# EAGLE board Teensy3p2Cutout (EAGLE 9.6.2)
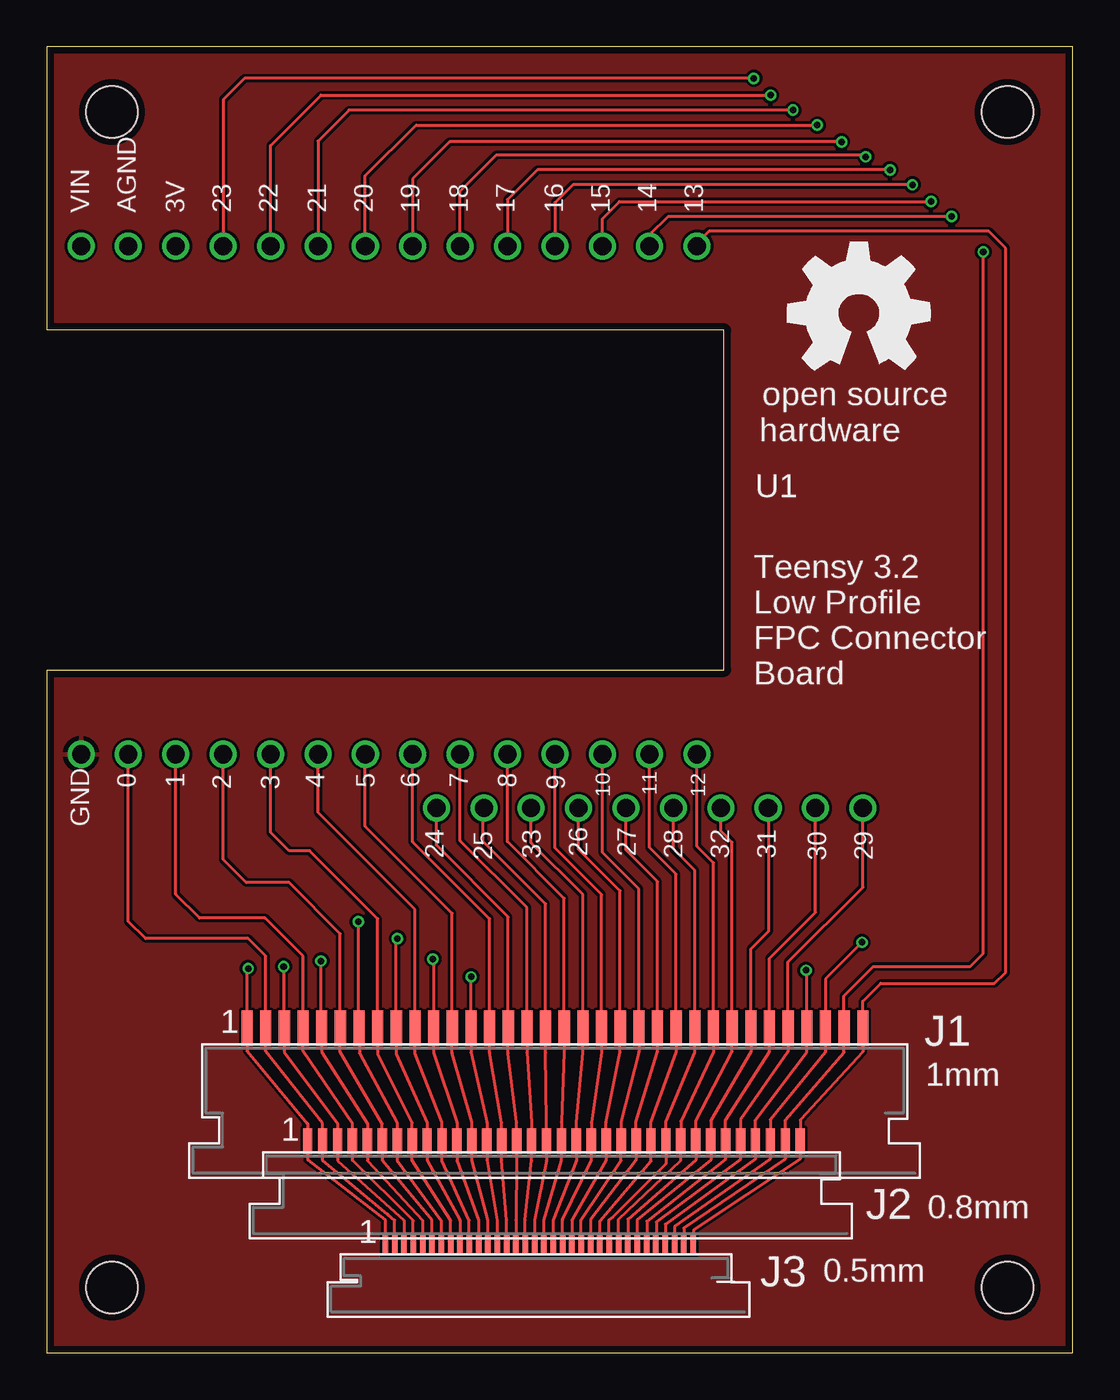
[diagram p0: board, top side]
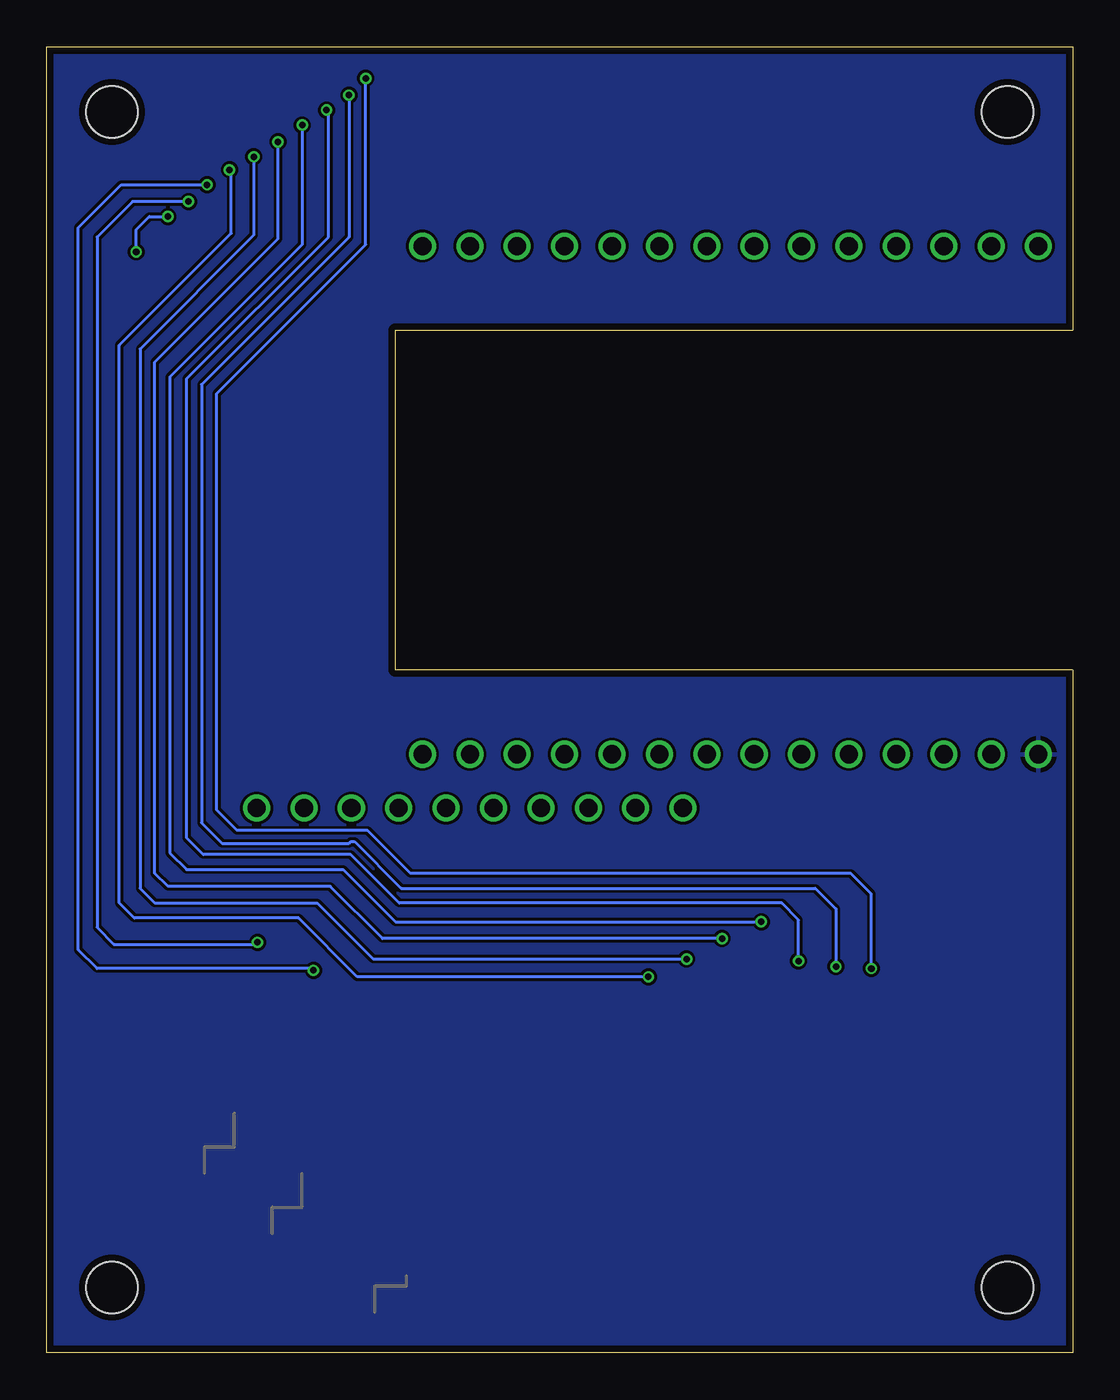
[diagram p1: board, bottom side, seen from below]

Size 55 x 70 mm. Coordinates in mm from the lower left corner, seen from the top.
Outline: 0,0 55,0 55,70 0,70 0,54.8 36.3,54.8 36.3,36.6 0,36.6 0,0
Copper layers (1*16): Top 0.035559375mm / dielectric 1.6mm / Bottom 0.035559375mm
Design rules "oshpark-2layer": minimum track width 6mil, minimum drill 10mil, track to track 6mil, track to pad 6mil, pad to pad 6mil, via to via 6mil, smd to smd 6mil, copper to edge 15mil, drill to drill 6mil, minimum pad ring 5mil, minimum via ring 5mil, stop-mask expansion 2.5mil, vias tented up to drill 0mil, thermal gap 10mil
Holes 2.75 mm at 3.5,66.5 3.5,3.5 51.5,3.5 51.5,66.5

## Footprints (pad centres in the part's own frame; a part is rotated, then mirrored left to right if it is on the bottom)
FPC34 = smd 0.6 x 1.9: 1 -13.7,3.86; 2 -12.7,3.86; 3 -11.7,3.86; 4 -10.7,3.86; 5 -9.7,3.86; 6 -8.7,3.86; 7 -7.7,3.86; 8 -6.7,3.86; 9 -5.7,3.86; 10 -4.7,3.86; 11 -3.7,3.86; 12 -2.7,3.86; 13 -1.7,3.86; 14 -0.7,3.86; 15 0.3,3.86; 16 1.3,3.86; 17 2.3,3.86; 18 3.3,3.86; 19 4.3,3.86; 20 5.3,3.86; 21 6.3,3.86; 22 7.3,3.86; 23 8.3,3.86; 24 9.3,3.86; 25 10.3,3.86; 26 11.3,3.86; 27 12.3,3.86; 28 13.3,3.86; 29 14.3,3.86; 30 15.3,3.86; 31 16.3,3.86; 32 17.3,3.86; 33 18.3,3.86; 34 19.3,3.86
FPC34_P8MM = smd 0.5 x 1.35: 1 -13.7,3.6; 2 -12.9,3.6; 3 -12.1,3.6; 4 -11.3,3.6; 5 -10.5,3.6; 6 -9.7,3.6; 7 -8.9,3.6; 8 -8.1,3.6; 9 -7.3,3.6; 10 -6.5,3.6; 11 -5.7,3.6; 12 -4.9,3.6; 13 -4.1,3.6; 14 -3.3,3.6; 15 -2.5,3.6; 16 -1.7,3.6; 17 -0.9,3.6; 18 -0.1,3.6; 19 0.7,3.6; 20 1.5,3.6; 21 2.3,3.6; 22 3.1,3.6; 23 3.9,3.6; 24 4.7,3.6; 25 5.5,3.6; 26 6.3,3.6; 27 7.1,3.6; 28 7.9,3.6; 29 8.7,3.6; 30 9.5,3.6; 31 10.3,3.6; 32 11.1,3.6; 33 11.9,3.6; 34 12.7,3.6
FPC34_P5MM = smd 0.3 x 1.1: 1 -13.7,3.5; 2 -13.2,3.5; 3 -12.7,3.5; 4 -12.2,3.5; 5 -11.7,3.5; 6 -11.2,3.5; 7 -10.7,3.5; 8 -10.2,3.5; 9 -9.7,3.5; 10 -9.2,3.5; 11 -8.7,3.5; 12 -8.2,3.5; 13 -7.7,3.5; 14 -7.2,3.5; 15 -6.7,3.5; 16 -6.2,3.5; 17 -5.7,3.5; 18 -5.2,3.5; 19 -4.7,3.5; 20 -4.2,3.5; 21 -3.7,3.5; 22 -3.2,3.5; 23 -2.7,3.5; 24 -2.2,3.5; 25 -1.7,3.5; 26 -1.2,3.5; 27 -0.7,3.5; 28 -0.2,3.5; 29 0.3,3.5; 30 0.8,3.5; 31 1.3,3.5; 32 1.8,3.5; 33 2.3,3.5; 34 2.8,3.5
TEENSY3P2CUTOUT = drill 0.965: 0 -15.24,-13.62; 1 -12.7,-13.62; 2 -10.16,-13.62; 3 -7.62,-13.62; 3V -12.7,13.62; 4 -5.08,-13.62; 5 -2.54,-13.62; 6 0,-13.62; 7 2.54,-13.62; 8 5.08,-13.62; 9 7.62,-13.62; 10 10.16,-13.62; 11 12.7,-13.62; 12 15.24,-13.62; 13 15.24,13.62; 14 12.7,13.62; 15 10.16,13.62; 16 7.62,13.62; 17 5.08,13.62; 18 2.54,13.62; 19 0,13.62; 20 -2.54,13.62; 21 -5.08,13.62; 22 -7.62,13.62; 23 -10.16,13.62; 24 1.27,-16.51; 25 3.81,-16.51; 26 8.89,-16.51; 27 11.43,-16.51; 28 13.97,-16.51; 29 24.13,-16.51; 30 21.59,-16.51; 31 19.05,-16.51; 32 16.51,-16.51; 33 6.35,-16.51; AGND -15.24,13.62; GND -17.78,-13.62; VIN -17.78,13.62

## Placement (x,y rotation side)
J1  1mm  [FPC34]  24.44,13.53 0 top
J2  0.8mm  [FPC34_P8MM]  27.69,7.75 0 top
J3  0.5mm  [FPC34_P5MM]  31.85,2.27 0 top
U1  Teensy 3.2  [TEENSY3P2CUTOUT]  19.62,45.7 0 top
U$1  [OSHW_8MM]  43.5,55.7 0 top

## Library data of the parts
J1 = FPC34
J2 = FPC34_p8mm
J3 = FPC34_p5mm
U1 = TEENSY3P2CUTOUT
U$1 = oshw

## Nets
0: J1.2 J2.2 J3.2 U1.0
1: J1.4 J2.4 J3.4 U1.1
2: J1.6 J2.6 J3.6 U1.2
3: J1.8 J2.8 J3.8 U1.3
4: J1.10 J2.10 J3.10 U1.4
5: J1.12 J2.12 J3.12 U1.5
6: J1.14 J2.14 J3.14 U1.6
7: J1.16 J2.16 J3.16 U1.7
8: J1.18 J2.18 J3.18 U1.8
9: J1.20 J2.20 J3.20 U1.9
10: J1.22 J2.22 J3.22 U1.10
11: J1.24 J2.24 J3.24 U1.11
12: J1.26 J2.26 J3.26 U1.12
13: J1.34 J2.34 J3.34 U1.13
14: J1.33 J2.33 J3.33 U1.14
15: J1.32 J2.32 J3.32 U1.15
16: J1.31 J2.31 J3.31 U1.16
17: J1.13 J2.13 J3.13 U1.17
18: J1.11 J2.11 J3.11 U1.18
19: J1.9 J2.9 J3.9 U1.19
20: J1.7 J2.7 J3.7 U1.20
21: J1.5 J2.5 J3.5 U1.21
22: J1.3 J2.3 J3.3 U1.22
23: J1.1 J2.1 J3.1 U1.23
24: J1.15 J2.15 J3.15 U1.24
25: J1.17 J2.17 J3.17 U1.25
26: J1.21 J2.21 J3.21 U1.26
27: J1.23 J2.23 J3.23 U1.27
28: J1.25 J2.25 J3.25 U1.28
29: J1.30 J2.30 J3.30 U1.29
30: J1.29 J2.29 J3.29 U1.30
31: J1.28 J2.28 J3.28 U1.31
32: J1.27 J2.27 J3.27 U1.32
33: J1.19 J2.19 J3.19 U1.33
GND: U1.GND

## Tracks (layer width: path | path; a pad name or v marks a point on that pad's centre or on a via)
0
  Top 0.152: U1.0 4.38,23.12 5.3,22.2 10.8,22.2 11.74,21.26 J1.2 11.74,16.15 14.79,12.29 J2.2 14.79,10.32 18.27,7.42 18.28,7.42 18.3,7.4 18.65,7.11 J3.2
1
  Top 0.152: U1.1 6.92,24.58 8.2,23.3 11.7,23.3 13.74,21.26 J1.4 13.74,16.16 16.39,12.28 J2.4 16.39,10.31 19.65,7.1 J3.4
2
  Top 0.152: U1.2 9.46,26.44 10.7,25.2 13,25.2 15.74,22.46 J1.6 15.74,16.12 17.99,12.28 J2.6 18,10.3 20.65,7.1 J3.6
3
  Top 0.152: U1.3 12,27.9 13,26.9 14.1,26.9 17.74,23.26 J1.8 17.75,15.99 19.59,12.34 J2.8 19.59,10.31 21.65,7.1 J3.8
4
  Top 0.152: U1.4 14.54,28.96 19.74,23.76 J1.10 19.74,16.04 21.19,12.34 J2.10 21.19,10.3 22.65,7.11 J3.10
5
  Top 0.152: U1.5 17.08,28.22 21.74,23.56 J1.12 21.74,16.08 22.79,12.34 J2.12 22.79,10.31 23.65,7.11 J3.12
6
  Top 0.152: U1.6 19.62,27.38 23.74,23.26 J1.14 23.74,16.1 24.39,12.33 J2.14 24.39,10.34 24.65,7.11 J3.14
7
  Top 0.152: U1.7 22.16,27.44 25.74,23.86 J1.16 25.74,16.1 25.99,12.36 J2.16 25.99,10.31 25.65,7.12 J3.16
8
  Top 0.152: U1.8 24.7,27.4 27.74,24.36 J1.18 27.74,16.13 27.59,12.36 J2.18 27.59,10.3 26.65,7.11 J3.18
9
  Top 0.152: U1.9 27.24,27.06 29.74,24.56 J1.20 29.74,16.1 29.19,12.35 J2.20 29.19,10.32 27.65,7.12 J3.20
10
  Top 0.152: U1.10 29.78,26.82 31.74,24.86 J1.22 31.74,16.13 30.79,12.37 J2.22 30.79,10.31 28.65,7.12 J3.22
11
  Top 0.152: U1.11 32.32,27.08 33.74,25.66 J1.24 33.74,16.13 32.37,12.35 32.37,11.35 J2.24 32.39,10.29 29.65,7.07 J3.24
12
  Top 0.152: U1.12 34.86,27.14 35.74,26.26 J1.26 35.74,16.13 33.99,12.41 J2.26 33.99,10.31 30.65,7.16 J3.26
13
  Top 0.152: U1.13 34.86,59.46 35.5,60.1 50.5,60.1 51.4,59.2 51.4,20.4 50.8,19.8 44.7,19.8 43.74,18.84 J1.34 43.74,16.14 40.39,12.48 J2.34 40.39,10.4 34.67,6.59 J3.34
14  (via drill 0.35)
  Top 0.152: v50.2,59 50.2,21.4 49.5,20.7 44.3,20.7 42.74,19.14 J1.33 42.74,16.11 39.59,12.48 J2.33 39.59,10.4 34.15,6.69 J3.33 | v48.5,60.9 33.3,60.9 32.32,59.92 U1.14
  Bottom 0.152: v50.2,59 50.2,60.2 49.5,60.9 v48.5,60.9
15  (via drill 0.35)
  Top 0.152: v43.7,22 41.74,20.04 J1.32 41.74,16.11 38.79,12.49 J2.32 38.79,10.41 33.66,6.78 J3.32 | U1.15 29.78,60.78 30.7,61.7 v47.4,61.7
  Bottom 0.152: v43.7,22 43.8,21.9 51.4,21.9 52.3,22.8 52.3,59.8 50.4,61.7 v47.4,61.7
16  (via drill 0.35)
  Top 0.152: v40.7,20.5 40.74,20.46 J1.31 40.74,16.12 37.99,12.48 J2.31 37.99,10.4 33.16,6.89 J3.31 | v46.4,62.6 28.2,62.6 27.24,61.64 U1.16
  Bottom 0.152: v40.7,20.5 40.8,20.6 52.3,20.6 53.3,21.6 53.3,60.3 51,62.6 v46.4,62.6
17  (via drill 0.35)
  Top 0.152: v22.75,20.15 22.8,20.1 22.74,20.04 J1.13 22.74,16.09 23.59,12.33 J2.13 23.59,10.33 24.15,7.11 J3.13 | v45.2,63.4 26.3,63.4 24.7,61.8 U1.17
  Bottom 0.152: v22.75,20.15 38.35,20.15 41.5,23.3 50.3,23.3 51.1,24.1 51.1,54 45.1,60 45.1,63.3 v45.2,63.4
18  (via drill 0.35)
  Top 0.152: U1.18 22.16,62.26 24.1,64.2 43.9,64.2 v43.9,64.1 | v20.7,21.1 20.74,21.06 J1.11 20.74,16.08 21.99,12.33 J2.11 21.99,10.29 23.15,7.11 J3.11
  Bottom 0.152: v43.9,64.1 43.9,59.9 50,53.8 50,24.9 49.2,24.1 40.5,24.1 37.5,21.1 v20.7,21.1
19  (via drill 0.35)
  Top 0.152: v18.8,22.2 18.74,22.14 J1.9 18.74,16.02 20.39,12.32 J2.9 20.39,10.31 22.15,7.1 J3.9 | v42.6,64.9 21.6,64.9 19.62,62.92 U1.19
  Bottom 0.152: v18.8,22.2 37,22.2 39.8,25 48.5,25 49.2,25.7 49.2,53.1 42.6,59.7 v42.6,64.9
20  (via drill 0.35)
  Top 0.152: U1.20 17.08,63.08 19.8,65.8 v41.3,65.8 | v16.7,23.1 16.7,17.43 J1.7 16.76,17.39 16.76,16.05 18.79,12.32 J2.7 18.79,10.31 21.15,7.1 J3.7
  Bottom 0.152: v41.3,65.8 41.3,59.4 48.4,52.3 48.4,26.8 47.5,25.9 39.1,25.9 36.3,23.1 v16.7,23.1
21  (via drill 0.35)
  Top 0.152: v14.7,21 14.7,17.43 J1.5 14.74,16.14 17.19,12.28 J2.5 17.2,10.3 20.15,7.1 J3.5 | v40,66.6 16.2,66.6 14.54,64.94 U1.21
  Bottom 0.152: v14.7,21 14.7,23.2 15.6,24.1 36.1,24.1 38.7,26.7 46.6,26.7 47.5,27.6 47.5,52.2 39.9,59.8 39.9,66.5 v40,66.6
22  (via drill 0.35)
  Top 0.152: U1.22 12,64.7 14.7,67.4 v38.8,67.4 | v12.7,20.7 12.7,17.43 J1.3 12.74,16.13 15.59,12.29 J2.3 15.6,10.3 19.15,7.1 J3.3
  Bottom 0.152: v38.8,67.4 38.8,59.8 46.7,51.9 46.7,28.4 45.6,27.3 38.8,27.3 38.7,27.4 38.5,27.4 36,24.9 13.8,24.9 12.7,23.8 v12.7,20.7
23  (via drill 0.35)
  Top 0.152: v10.8,20.6 10.74,20.54 J1.1 10.74,16.18 13.99,12.28 J2.1 13.99,10.34 18.15,7.12 J3.1 | v37.9,68.3 10.6,68.3 9.46,67.16 U1.23
  Bottom 0.152: v10.8,20.6 10.8,24.6 11.9,25.7 35.5,25.7 37.8,28 44.8,28 45.9,29.1 45.9,51.4 37.9,59.4 v37.9,68.3
24
  Top 0.152: U1.24 20.89,27.21 24.74,23.36 J1.15 24.74,16.05 25.19,12.34 J2.15 25.19,10.32 25.15,7.12 J3.15
25
  Top 0.152: U1.25 23.4,29.16 23.4,27.4 26.74,24.06 J1.17 26.74,16.08 26.79,12.36 J2.17 26.79,10.3 26.15,7.11 J3.17
26
  Top 0.152: U1.26 28.51,26.99 30.74,24.76 J1.21 30.74,16.11 29.99,12.35 J2.21 29.99,10.33 28.15,7.12 J3.21
27
  Top 0.152: U1.27 31.05,26.95 32.74,25.26 J1.23 32.74,16.13 31.58,12.37 J2.23 31.59,10.32 29.15,7.12 J3.23
28
  Top 0.152: U1.28 33.59,27.01 34.74,25.86 J1.25 34.74,16.11 33.19,12.38 J2.25 33.19,10.13 30.34,7.29 30.15,7.14 J3.25
29
  Top 0.152: U1.29 43.75,24.95 39.74,20.94 J1.30 39.74,16.14 37.19,12.48 J2.30 37.19,10.38 32.67,7.01 J3.30
30
  Top 0.152: U1.30 41.21,23.61 38.74,21.14 J1.29 38.74,16.13 36.39,12.47 J2.29 36.39,10.38 32.17,7.06 J3.29
31
  Top 0.152: U1.31 38.7,29.16 38.7,22.6 37.74,21.64 J1.28 37.74,16.13 35.59,12.45 J2.28 35.59,10.34 31.65,7.12 J3.28
32
  Top 0.152: U1.32 36.13,27.97 36.74,27.36 J1.27 36.74,16.13 36.73,16.13 34.79,12.43 J2.27 34.79,10.34 31.15,7.16 J3.27
33
  Top 0.152: U1.33 25.97,27.33 28.74,24.56 J1.19 28.74,16.1 28.39,12.35 J2.19 28.39,10.31 27.15,7.11 J3.19
GND
  pour Top: 0,0 0,36.6 0.3,36.6 36.3,36.6 36.3,37.4 36.3,54.8 35.9,54.8 0,54.8 0,55.3 0,70 0.5,70 55,70 55,69.7 55,0 54.3,0
  pour Bottom: 0,0 0,36.6 4.8,36.6 36.3,36.6 36.3,38.1 36.3,54.8 35.2,54.8 0,54.8 0,56 0,70 1.3,70 55,70 55,69 55,0 53.9,0

## Text on the board
tPlace: VIN | AGND | 3V | 23 | 22 | 21 | 20 | 19 | 18 | 17 | 16 | 15 | 14 | 13 | Teensy 3.2 / Low Profile / FPC Connector / Board | 0 | 1 | 2 | 3 | 4 | 5 | 6 | 7 | 8 | 9 | 10 | 11 | 12 | GND | 26 | 27 | 24 | 25 | 33 | 28 | 32 | 31 | 30 | 29 | 1mm | 0.8mm | 0.5mm